# Altium PCB EspejoCorriente.PcbDoc
Units mm, origin at the board's own origin, x right, y up, seen from the top; angles counter-clockwise.
Board outline 100 x 100 mm, 2 copper layers (Top Layer, Bottom Layer); 16 components, 7 nets, 31 pads, 0 vias.
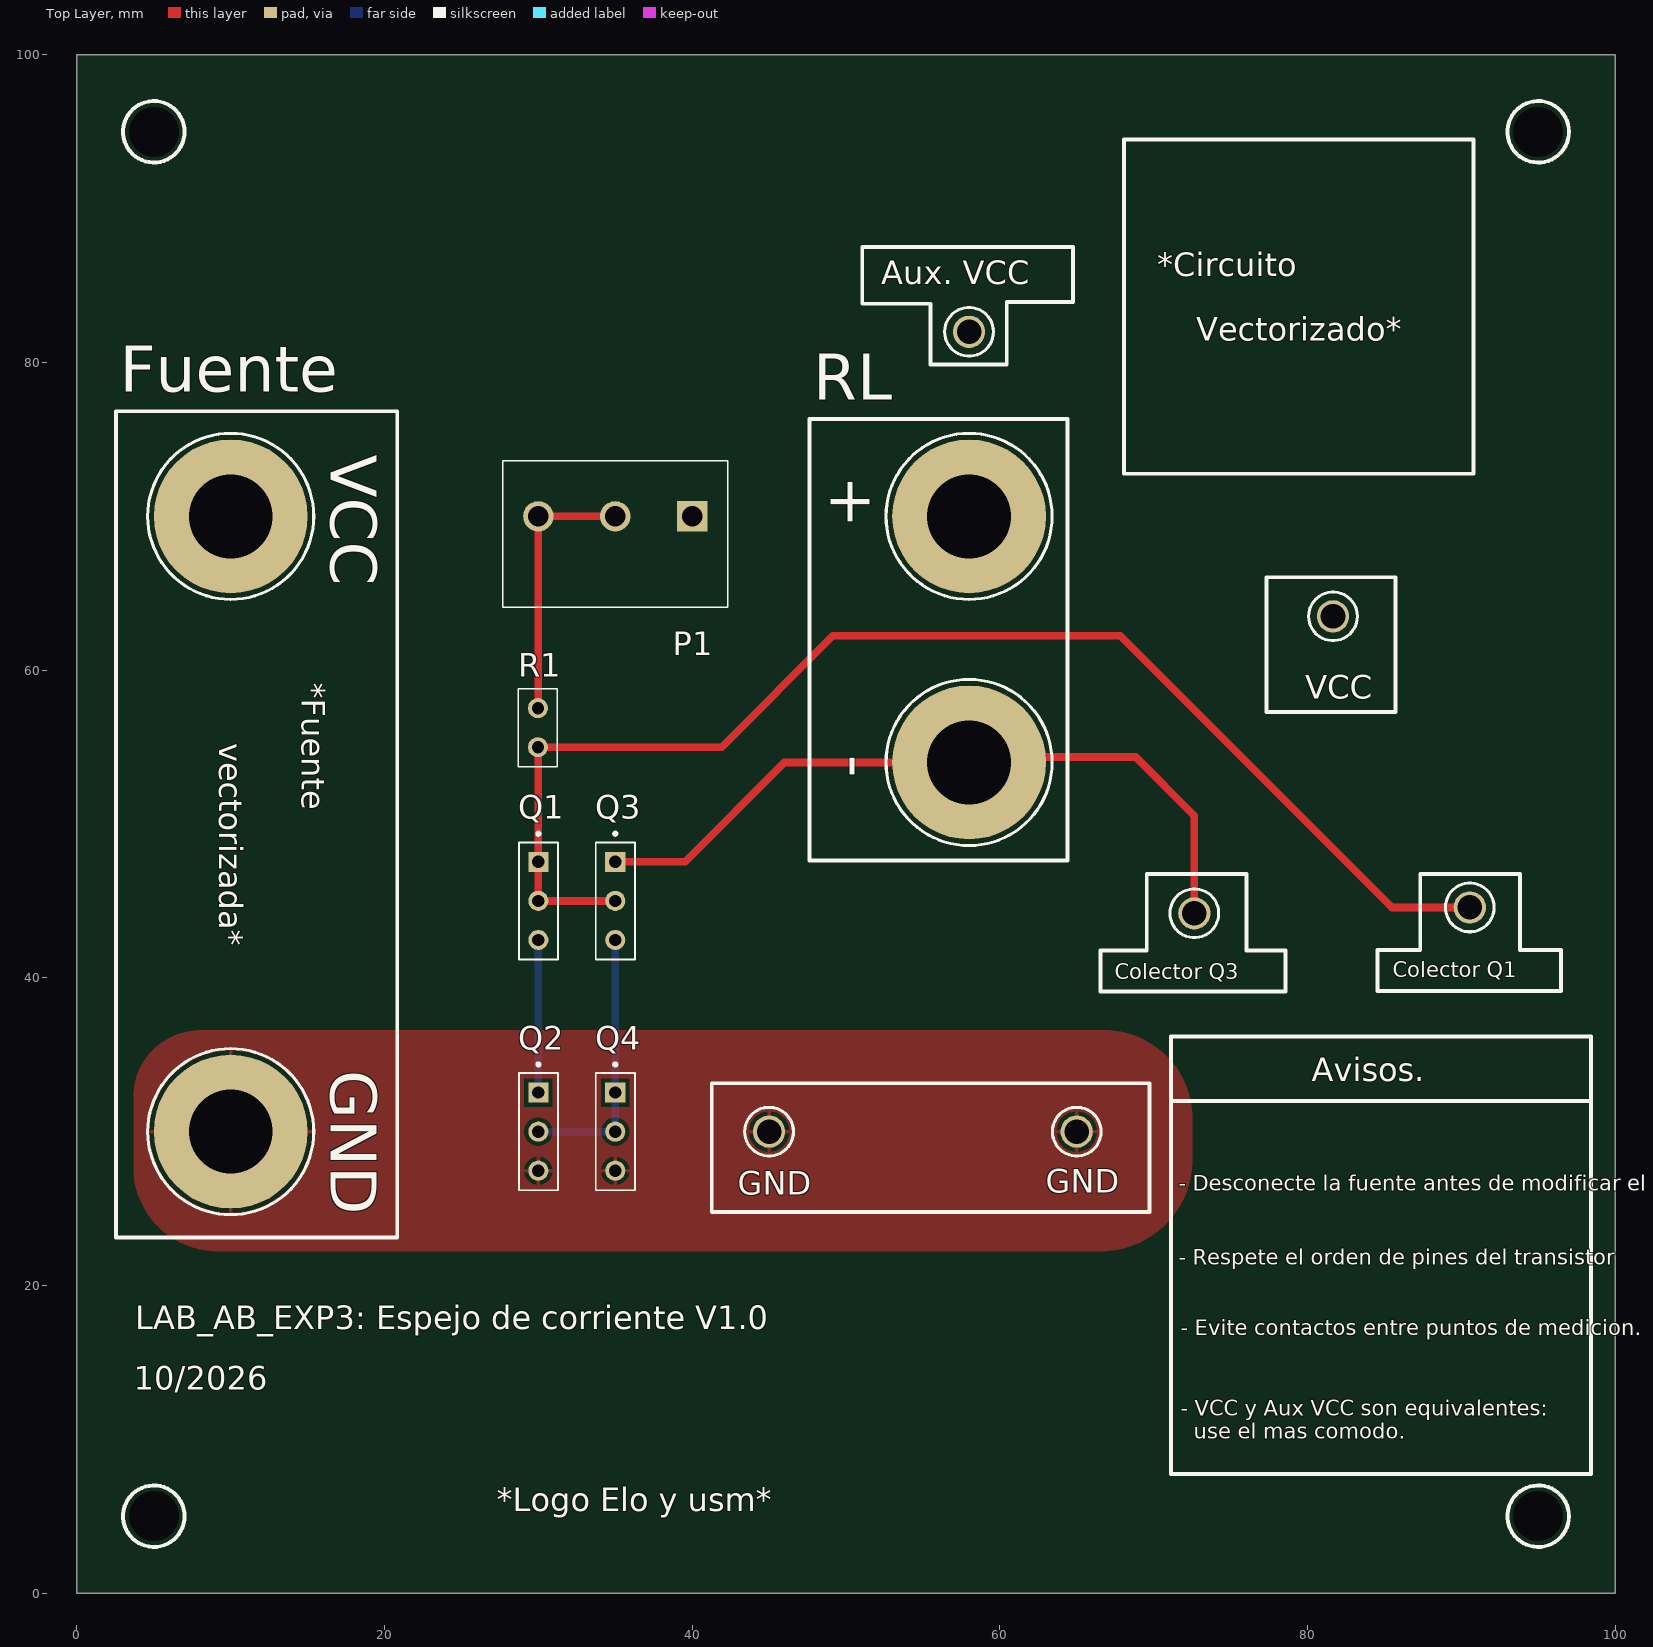
[diagram p0: Top Layer view]
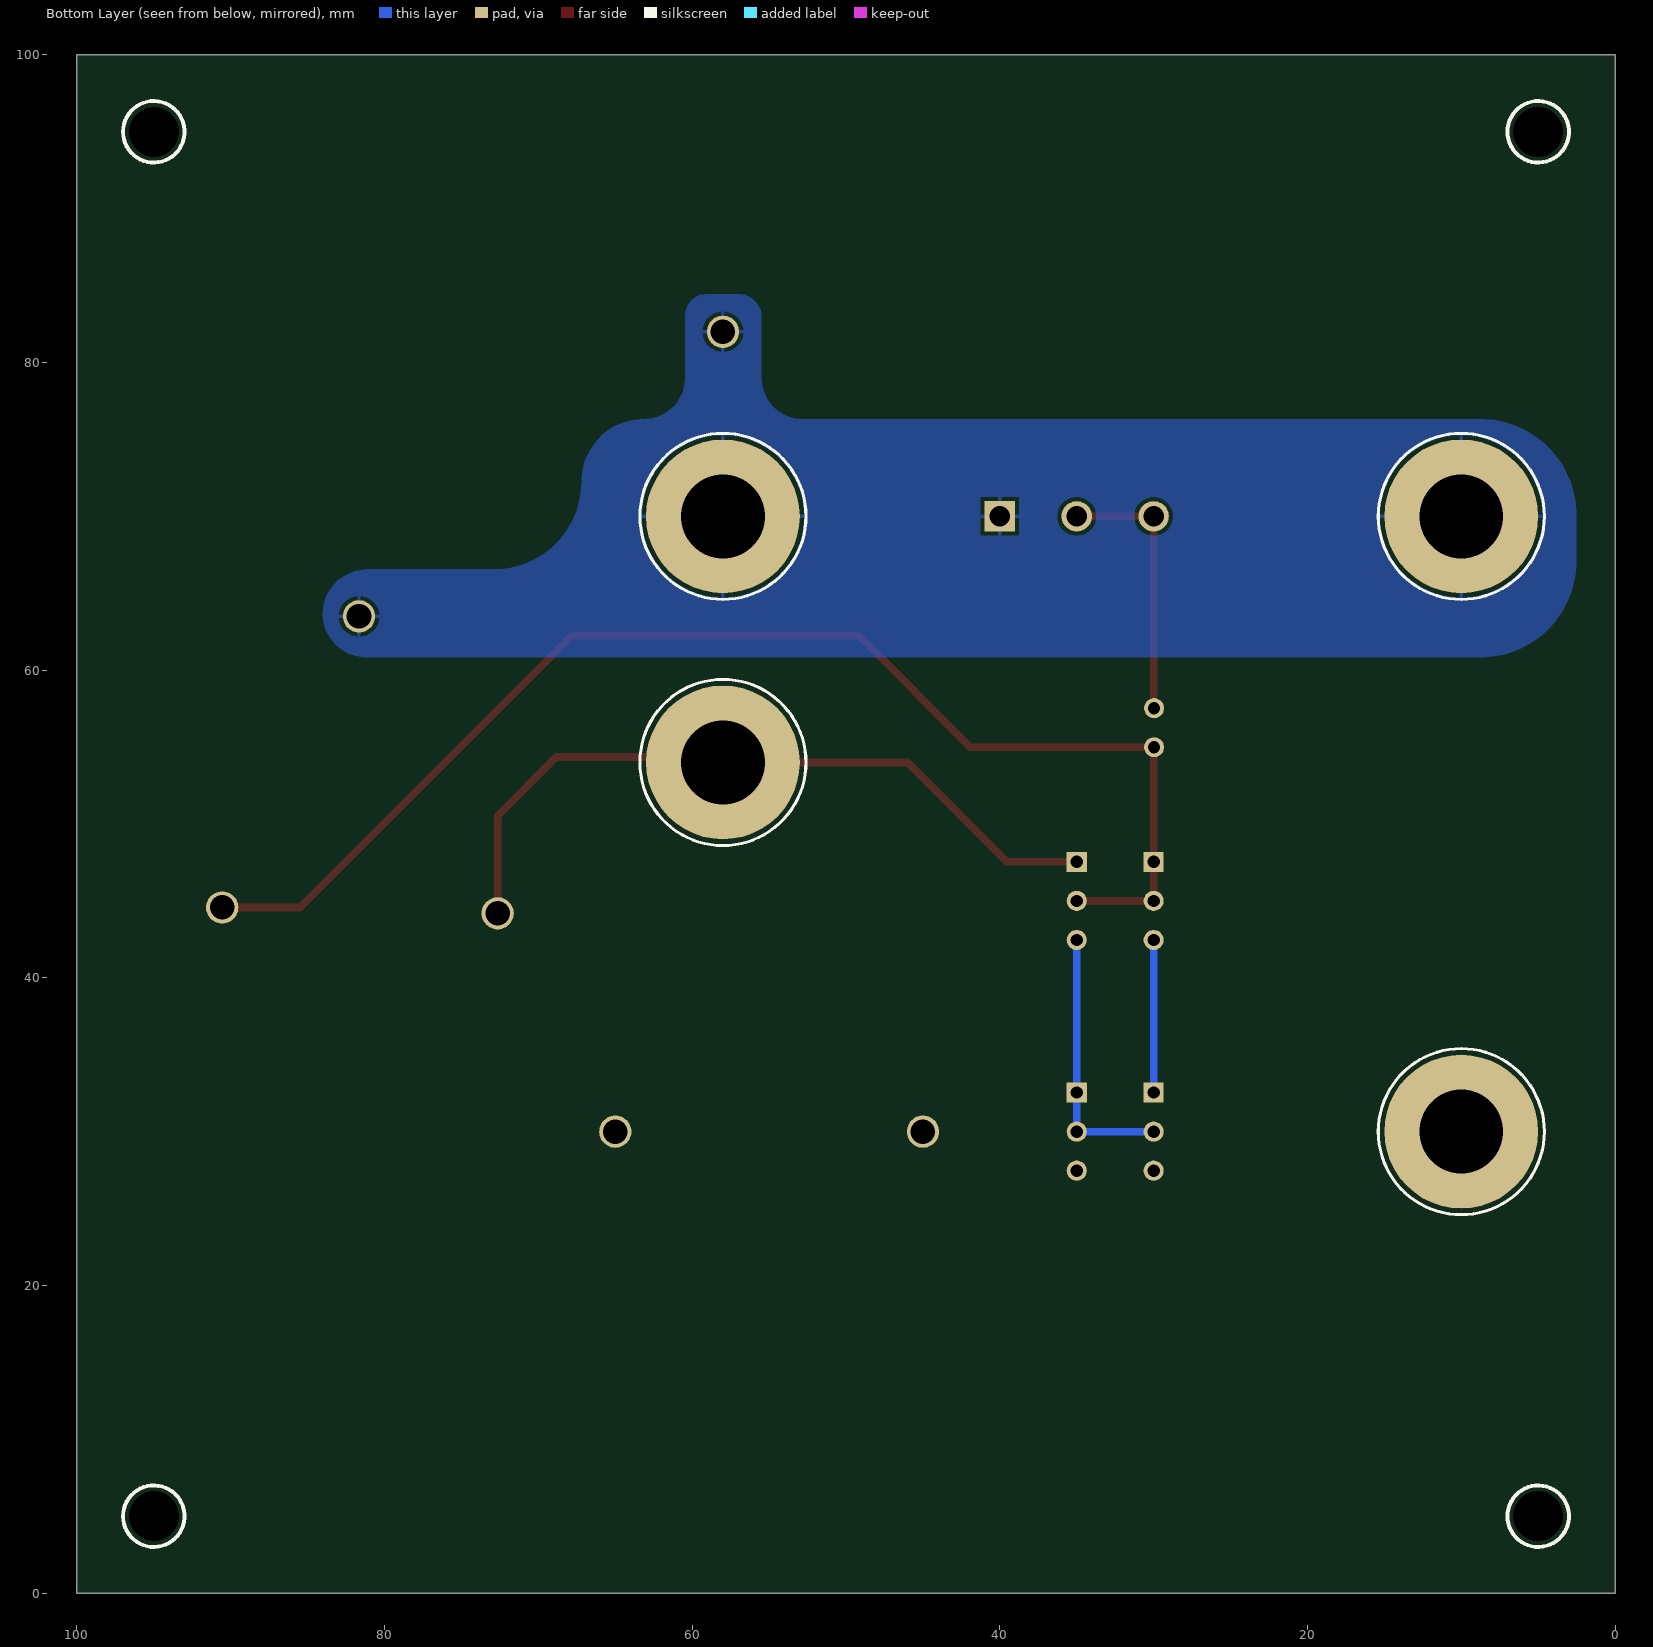
[diagram p1: Bottom Layer view, seen from below]
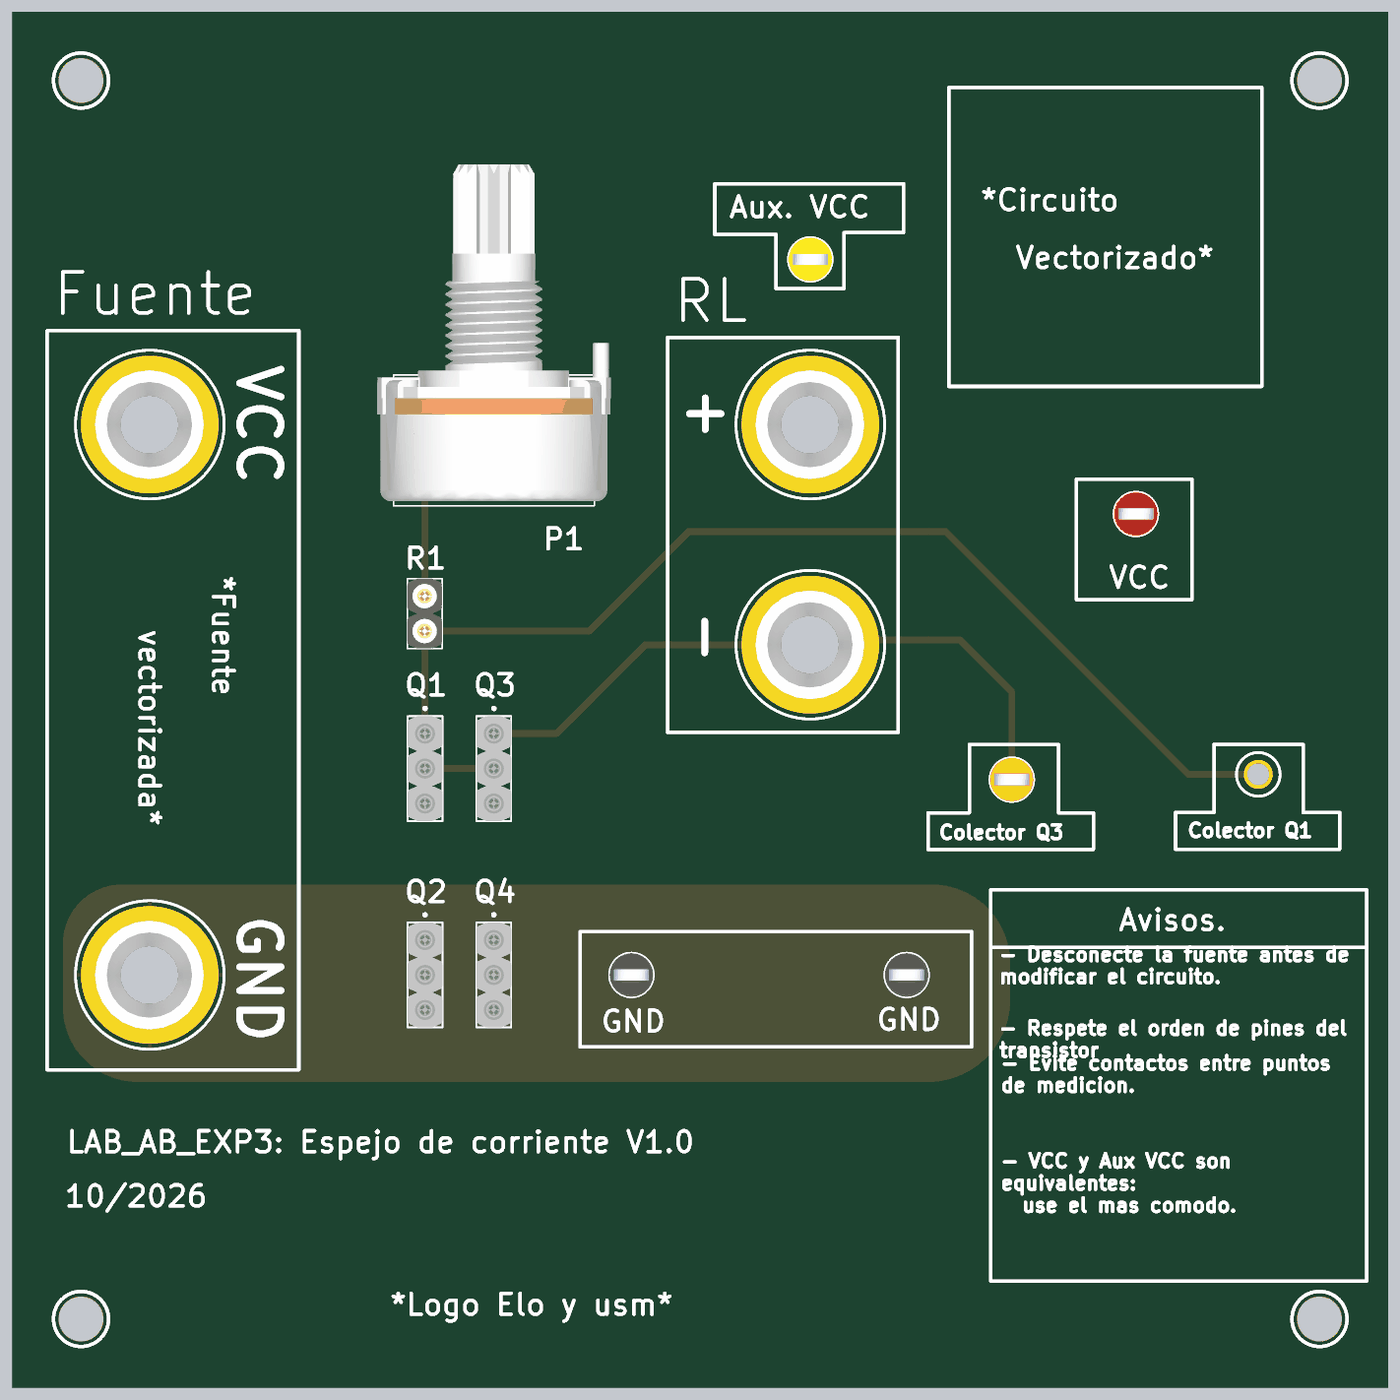
[diagram p2: 3D render of the assembled board from above, using the file's embedded part models]

## Layer stack, top to bottom
Top Solder: solder mask 0.0102, Solder Resist, Dk 3.5
Top Layer: signal copper 0.0356
Dielectric 1: dielectric 0.32, FR-4, Dk 4.8
Bottom Layer: signal copper 0.0356
Bottom Solder: solder mask 0.0102, Solder Resist, Dk 3.5

## Board outline
0,0 0,100 100,100 100,0

## Design rules (kind name [scope] priority, off if disabled: settings)
Clearance [All] p1: gap=0.254 ignorepadtopadclearanceinfootprint=FALSE
HoleSize [All] p1: absolutevalues=TRUE maxlimit=10 minlimit=0.025 maxpercent=80.000 minpercent=20.000
PolygonConnect [All] p1: connectstyle=Relief reliefconductorwidth=0.254 reliefentries=4 polygonreliefangle="90 Angle" airgapwidth=0.254
RoutingVias [All] p1: holewidth=0.711 width=1.27 viastyle="Through Hole" minholewidth=0.711 minwidth=1.27 maxholewidth=0.711 maxwidth=1.27
SolderMaskExpansion [All] p1: expansion=0 istentingtop=FALSE
SupplyNets "Schematic Supply Nets_1" [InNet('GND')] p1: voltage=0.000
SupplyNets "Schematic Supply Nets" [InNet('VCC')] p2: voltage=0.000
Width [All] p1: maxlimit=0.7 minlimit=0.254 preferedwidth=0.254
29 further rules are at their usual default settings.

## Components (designator, comment, footprint, x,y, rotation, side; value= is the part's Value field where it differs from the comment)
+ "575-4" KSTN-575-4 58,70 r0 top (schematic designator TP19)
- "575-4" KSTN-575-4 58,54 r0 top (schematic designator TP20)
"Aux. VCC" "5014" KSTN-5014_V 58,82 r180 top (schematic designator TP16)
"Colector Q1" "5012" KSTN-5012_V 90.551,44.577 r180 top (schematic designator TP15)
"Colector Q3" "5013" KSTN-5013_V 72.644,44.196 r180 top (schematic designator TP17)
GND "5011" KSTN-5011_V 65,30 r180 top (schematic designator TP1)
GND "5011" KSTN-5011_V 45,30 r0 top (schematic designator TP18)
GND "575-4" KSTN-575-4 10,30 r0 top (schematic designator TP11)
P1 "PDB181-K420K-502B" PDB181K220K104B 40,70 r90 top (schematic designator VR1)
Q1 "D01-9970342" HARWIN_D01-9970342 30,45 r90 top (schematic designator J13)
Q2 "D01-9970342" HARWIN_D01-9970342 30,30 r90 top (schematic designator J14)
Q3 "D01-9970342" HARWIN_D01-9970342 35,45 r90 top (schematic designator J15)
Q4 "D01-9970342" HARWIN_D01-9970342 35,30 r90 top (schematic designator J16)
R1 "D01-9970242" D019970242 29.972,54.991 r270 top (schematic designator J34)
VCC "5010" KSTN-5010_V 81.661,63.5 r180 top (schematic designator TP14)
VCC "575-4" KSTN-575-4 10,70 r0 top locked (schematic designator TP10)

## Footprints (in the part's own frame and the unit in brackets; to place one, negate y for a bottom-side part, rotate by r counter-clockwise, add the part's x,y. Pads: shape width x height; smd on the part's side, far side on the other; paste and mask are expansions set on the pad)
D019970242 [mm]
  round 1.3 hole 0.8: 1(0,0) 2(-2.54,0)
  silkscreen extent -3.81,-1.27 1.27,1.27, body extent -3.81,-1.27 1.27,1.27, height 4.22
HARWIN_D01-9970342 [mm]
  rect 1.308x1.308 / inner round 1.308 / far side rect 1.308x1.308 hole 0.8: 1(2.54,0)
  round 1.308 hole 0.8: 2(0,0) 3(-2.54,0)
  silkscreen extent -3.81,-1.27 4.47,1.27, body extent -3.81,-1.27 3.81,1.27, height 4.22
KSTN-575-4 [mm] "Banana Jack, Non-Insulated, Dia 7.92mm"
  round 10 hole 5.45: 1(0,0)
  silkscreen extent -5.4,-5.4 5.4,5.4, body extent -3.98,-3.96 3.92,3.94, height 2.36
KSTN-5010_V [mm] "Test Point, Dia 3.17mm"
  round 2.1 hole 1.6: 1(0,0)
  silkscreen extent -1.59,-1.58 1.59,1.58, body extent -1.59,-1.59 1.59,1.59, height 8.13
KSTN-5011_V [mm] "Test Point, Dia 3.17mm"
  round 2.1 hole 1.6: 1(0,0)
  silkscreen extent -1.59,-1.58 1.59,1.58, body extent -1.59,-1.59 1.59,1.59, height 8.13
KSTN-5012_V [mm] "Test Point, Dia 3.17mm"
  round 2.1 hole 1.6: 1(0,0)
  silkscreen extent -1.59,-1.58 1.59,1.58, body extent -1.59,-1.59 1.59,1.59, height 8.13
KSTN-5013_V [mm] "Test Point, Dia 3.17mm"
  round 2.1 hole 1.6: 1(0,0)
  silkscreen extent -1.59,-1.58 1.59,1.58, body extent -1.59,-1.59 1.59,1.59, height 8.13
KSTN-5014_V [mm] "Test Point, Dia 3.17mm"
  round 2.1 hole 1.6: 1(0,0)
  silkscreen extent -1.59,-1.58 1.59,1.58, body extent -1.59,-1.59 1.59,1.59, height 8.13
PDB181K220K104B [mm]
  rect 1.98x1.98 hole 1.32: 1(0,0)
  round 1.98 hole 1.32: 2(0,5) 3(0,10)
  silkscreen extent -5.9,-2.3 3.6,12.3, body extent -5.58,-3.5 18.92,13.49, height 21.2

## Part data
+ - GND VCC: library part CMP-2000-05649-1, "Banana Jack, Non-Insulated, 1-Pin THD, RoHS, Bulk", Color=-, Manufacturer=Keystone-Electronics, Package Description="1-Pin Through Hole Device, Dia 7.92 mm", Package Version="Rev. B, 11/1994", Body Material=-, Category=Connectors,Interconnects, Contact Finish=Nickel, Contact Material=Brass, Datasheet URL=http://www.keyelco.com/product-pdf.cfm?p=2379, Datasheet Version="Rev. B, 11/1994", Family=BananaandTipConnectors-Jacks,Plugs, Features=-, Gender=Female, Insulation=Non-Insulated, Manufacturer URL=http://www.keyelco.com/, Mounting Technology=ThroughHole, Mounting Type=ThroughHole, Operating Temperature=-, Package Reference=575-4, Package URL=http://www.keyelco.com/product-pdf.cfm?p=2379, Packaging=Bulk, Plug/Mating Plug Diameter=StandardBanana, Series=-, Termination=Solder, Type=BananaJack, Wire Gauge=-
"Aux. VCC": library part CMP-1672-00006-4, "Test Point, Yellow, Through Hole, RoHS, Bulk", Colour=Yellow, Manufacturer=Keystone, Package Quantity=100, ComponentLink1Description="Manufacturer URL", ComponentLink1URL=http://www.keyelco.com/, ComponentLink2Description=Datasheet, ComponentLink2URL=http://www.keyelco.com/product-pdf.cfm?p=1323, Contact Material=Bronze, Contact Plating=Silver, DatasheetVersion="Rev. F, 12/2013", Height="8.12 mm", Mount="Through Hole", Mounting Technology="Through Hole", PackageDescription="1-Pin Through Hole Device, Dia 3.17 mm", PackageReference=5014, Packaging=Bulk, REACH SVHC="No SVHC", RoHSCompliant=true
"Colector Q1": library part CMP-1672-00004-4, "Test Point, White, Through Hole, RoHS, Bulk", Colour=White, Manufacturer=Keystone, Package Quantity=100, ComponentLink1Description="Manufacturer URL", ComponentLink1URL=http://www.keyelco.com/, ComponentLink2Description=Datasheet, ComponentLink2URL=http://www.keyelco.com/product-pdf.cfm?p=1321, Contact Material=Bronze, Contact Plating=Silver, DatasheetVersion="Rev. F, 12/2013", Height="8.12 mm", Length="11.3 mm", Mount="Through Hole", Mounting Technology="Through Hole", PackageDescription="1-Pin Through Hole Device, Dia 3.17 mm", PackageReference=5012, Packaging=Bulk, Pins=1, REACH SVHC="No SVHC", RoHSCompliant=true
"Colector Q3": library part CMP-1672-00005-4, "Test Point, Orange, Through Hole, RoHS, Bulk", Colour=Orange, Manufacturer=Keystone, Package Quantity=100, ComponentLink1Description="Manufacturer URL", ComponentLink1URL=http://www.keyelco.com/, ComponentLink2Description=Datasheet, ComponentLink2URL=http://www.keyelco.com/product-pdf.cfm?p=1322, Contact Material=Bronze, Contact Plating=Silver, DatasheetVersion="Rev. F, 12/2013", Height="8.12 mm", Mount="Through Hole", Mounting Technology="Through Hole", PackageDescription="1-Pin Through Hole Device, Dia 3.17 mm", PackageReference=5013, Packaging=Bulk, REACH SVHC="No SVHC", RoHSCompliant=True
GND GND: library part CMP-1672-00003-4, "Test Point, Black, Through Hole, RoHS, Bulk", Colour=Black, Manufacturer=Keystone, Package Quantity=100, ComponentLink1Description="Manufacturer URL", ComponentLink1URL=http://www.keyelco.com/, ComponentLink2Description=Datasheet, ComponentLink2URL=http://www.keyelco.com/product-pdf.cfm?p=1320, Contact Material=Bronze, Contact Plating=Silver, DatasheetVersion="Rev. F, 12/2013", Height="8.12 mm", Mount="Through Hole", Mounting Technology="Through Hole", PackageDescription="1-Pin Through Hole Device, Dia 3.17 mm", PackageReference=5011, Packaging=Bulk, Pins=1, REACH SVHC="No SVHC", RoHSCompliant=true
P1: "Variable Resistor", Manufacturer_Name=Bourns, Mouser Part Number=652-PDB181-K420K502B, Arrow Part Number=PDB181-K420K-502B, Arrow Price/Stock=https://www.arrow.com/en/products/pdb181-k420k-502b/bourns?region=nac, Datasheet Link=https://www.bourns.com/docs/product-datasheets/PDB18.pdf, Height=16.5mm, Manufacturer_Part_Number=PDB181-K420K-502B, Mouser Price/Stock=https://www.mouser.co.uk/ProductDetail/Bourns/PDB181-K420K-502B?qs=Ivs1Be2ZGq6EMYRq4LQhiA%3D%3D
Q1 Q2 Q3 Q4: Package=None, Availability=Unavailable, MP=D01-9970342, Price=None
R1: "IC Socket: 2 Pos Receptacle SIL Straight THT Strip", Manufacturer_Name=Harwin, Mouser Part Number=855-D01-9970242, Datasheet Link=https://content.harwin.com/m/e0b6c35948424a73/original/DRG-00097-Technical-Drawing-Datasheet-D01-997-pdf.pdf, Geometry.Height=4.2mm, Manufacturer_Part_Number=D01-9970242, Mouser Price/Stock=https://www.mouser.co.uk/ProductDetail/Harwin/D01-9970242?qs=TpUtqFO9vU%252Bf37OJ5TYoTQ%3D%3D
VCC: library part CMP-1672-00002-4, "Test Point, Red, Through Hole, RoHS, Bulk", Colour=Red, Manufacturer=Keystone, Package Quantity=100, ComponentLink1Description="Manufacturer URL", ComponentLink1URL=http://www.keyelco.com/, ComponentLink2Description=Datasheet, ComponentLink2URL=http://www.keyelco.com/product-pdf.cfm?p=1319, Contact Material=Bronze, Contact Plating=Silver, DatasheetVersion="Rev. F, 12/2013", Height="8.12 mm", Mount="Through Hole", Mounting Technology="Through Hole", PackageDescription="1-Pin Through Hole Device, Dia 3.17 mm", PackageReference=5010, Packaging=Bulk, Pins=1, REACH SVHC="No SVHC", RoHSCompliant=true

## Free pads (board coordinates)
  round 0 hole 3.25: 8(5,5) 8(5,95) 8(95,5) 8(95,95)

## Nets (pads, with @x,y where several pads share a name; then routed paths per layer and width w, separated by ;. In a path a pad name is that pad's centre, name@x,y a point inside that pad or via, vN(x,y) a via of type N, cw(c..) or ccw(c..) an arc to the next point about the centre after c; other vN are vias at no path point)
Col/Base_1: "Colector Q1.1" Q1.1 Q1.2 Q3.2 R1.1 | length 85.9
  Top Layer w0.5: Q3.2 Q1.2 Q1.1 29.986,47.554 29.986,54.977 R1.1 41.91,54.991 49.149,62.23 67.818,62.23 85.471,44.577 90.551,44.577
Col/Base_2: Q2.2 Q3.3 Q4.1 Q4.2 | length 17.5
  Bottom Layer w0.5: Q2.2 Q4.2 Q4.1 Q3.3
Colector_2: "Colector Q3.1" -.1 Q3.1 | length 48.4
  Top Layer w0.5: Q3.1 39.539,47.54 45.999,54 -.1 58.356,54.356 66.294,54.356 68.834,54.356 72.644,50.546 72.644,44.196
Emisor_1: Q1.3 Q2.1 | length 9.9
  Bottom Layer w0.5: Q2.1 Q1.3
GND: GND.1 Q2.3 Q4.3
Pot_out: P1.2 P1.3 R1.2 | length 17.4
  Top Layer w0.5: R1.2@30,57.559 P1.3 P1.2
VCC: "Aux. VCC.1" +.1 P1.1 VCC.1

## Polygon pours and split planes (outlines as drawn)
VCC on Bottom Layer "VCC_L02_P001" (solid, pour order 1): 81.153,60.833 8.763,60.833 cw(c8.763,67.056) 2.54,67.056 2.54,70.104 cw(c8.763,70.104) 8.763,76.327 52.832,76.327 ccw(c52.832,78.994) 55.499,78.994 55.499,82.931 cw(c57.023,82.931) 57.023,84.455 59.055,84.455 cw(c59.055,83.058) 60.452,83.058 60.452,78.994 ccw(c63.119,78.994) 63.119,76.327 cw(c63.119,72.263) 67.183,72.263 ccw(c72.898,72.263) 72.898,66.548 81.026,66.548 cw(c81.026,63.249) 81.95,66.416 cw(c81.153,63.681)
GND on Top Layer "GND_L01_P002" (solid, pour order 2): 8.001,36.576 66.802,36.576 cw(c66.802,30.861) 72.517,30.861 72.517,28.194 cw(c66.548,28.194) 66.548,22.225 9.144,22.225 cw(c9.144,27.686) 3.683,27.686 3.683,32.258 cw(c8.001,32.258)

## Silkscreen, mask and mechanical layers (free items; w line width, h text height)
Top Overlay:
  circle w0.254: c95,5 r2
  circle w0.254: c95,95 r2
  circle w0.254: c5,5 r2
  circle w0.254: c5,95 r2
  lines w0.254: 66.548,39.116 66.548,41.783 ; 66.633,39.121 78.571,39.121 78.571,41.788 76.031,41.788 76.031,46.741 69.554,46.741 69.554,41.788 66.633,41.788 ; 71.12,32.004 98.298,32.004 ; 71.12,7.747 71.12,7.747 ; 71.12,7.747 71.12,36.195 98.425,36.195 98.425,10.795 98.425,7.747 71.12,7.747 ; 2.54,23.114 2.54,74.803 2.54,76.835 20.828,76.835 20.828,23.114 2.54,23.114 ; 41.275,24.765 69.723,24.765 69.723,33.147 41.275,33.147 41.275,24.765 ; 47.625,47.625 47.625,76.327 64.389,76.327 64.389,47.625 47.625,47.625 ; 51.054,83.82 51.054,87.503 64.77,87.503 64.77,83.947 60.452,83.947 60.452,79.883 55.499,79.883 55.499,83.82 51.054,83.82 ; 68.072,72.771 68.072,94.488 90.805,94.488 90.805,72.771 68.072,72.771 ; 77.343,57.277 85.725,57.277 85.725,66.04 77.343,66.04 77.343,57.277 ; 84.54,39.135 96.478,39.135 96.478,41.802 93.811,41.802 93.811,46.755 87.334,46.755 87.334,41.802 84.54,41.802 84.54,39.135
  text "*Circuito" at 70.231,85.598 h1.52
  text "Vectorizado*" at 72.771,81.407 h1.52
  text "Fuente" at 2.794,78.089 h3
  text "RL" at 47.879,77.581 h3
  text "*Fuente" at 14.605,59.182 h1.52 r270
  text "vectorizada*" at 9.271,55.245 h1.52 r270
  text "Avisos." at 80.264,33.274 h1.52
  text "- Desconecte la fuente antes de modificar el circuito." at 71.628,26.162 h1
  text "- Respete el orden de pines del transistor" at 71.628,21.336 h1
  text "LAB_AB_EXP3: Espejo de corriente V1.0" at 3.81,17.145 h1.52
  text "- Evite contactos entre puntos de medicion." at 71.755,16.764 h1
  text "10/2026" at 3.683,13.208 h1.52
  text "- VCC y Aux VCC son equivalentes: /   use el mas comodo." at 71.755,10.033 h1
  text "*Logo Elo y usm*" at 27.305,5.334 h1.52
Bottom Overlay:
  circle w0.254: c95,95 r2
  circle w0.254: c95,5 r2
  circle w0.254: c5,5 r2
  circle w0.254: c5,95 r2